# Altium PCB ETL_RB_v1.3.PcbDoc (part 2 of 5)
Units mm, origin at the board's own origin, x right, y up, seen from the top; angles counter-clockwise.
Board outline 130.3 x 56.5 mm, 8 copper layers (Top Layer, plane 1, M1, plane 2, plane 3, M2, plane 4, Bottom Layer), stack 0.972 mm thick; 212 components, 186 nets, 1928 pads, 1009 vias.
Unrouted connection lines stored in the file: 379.
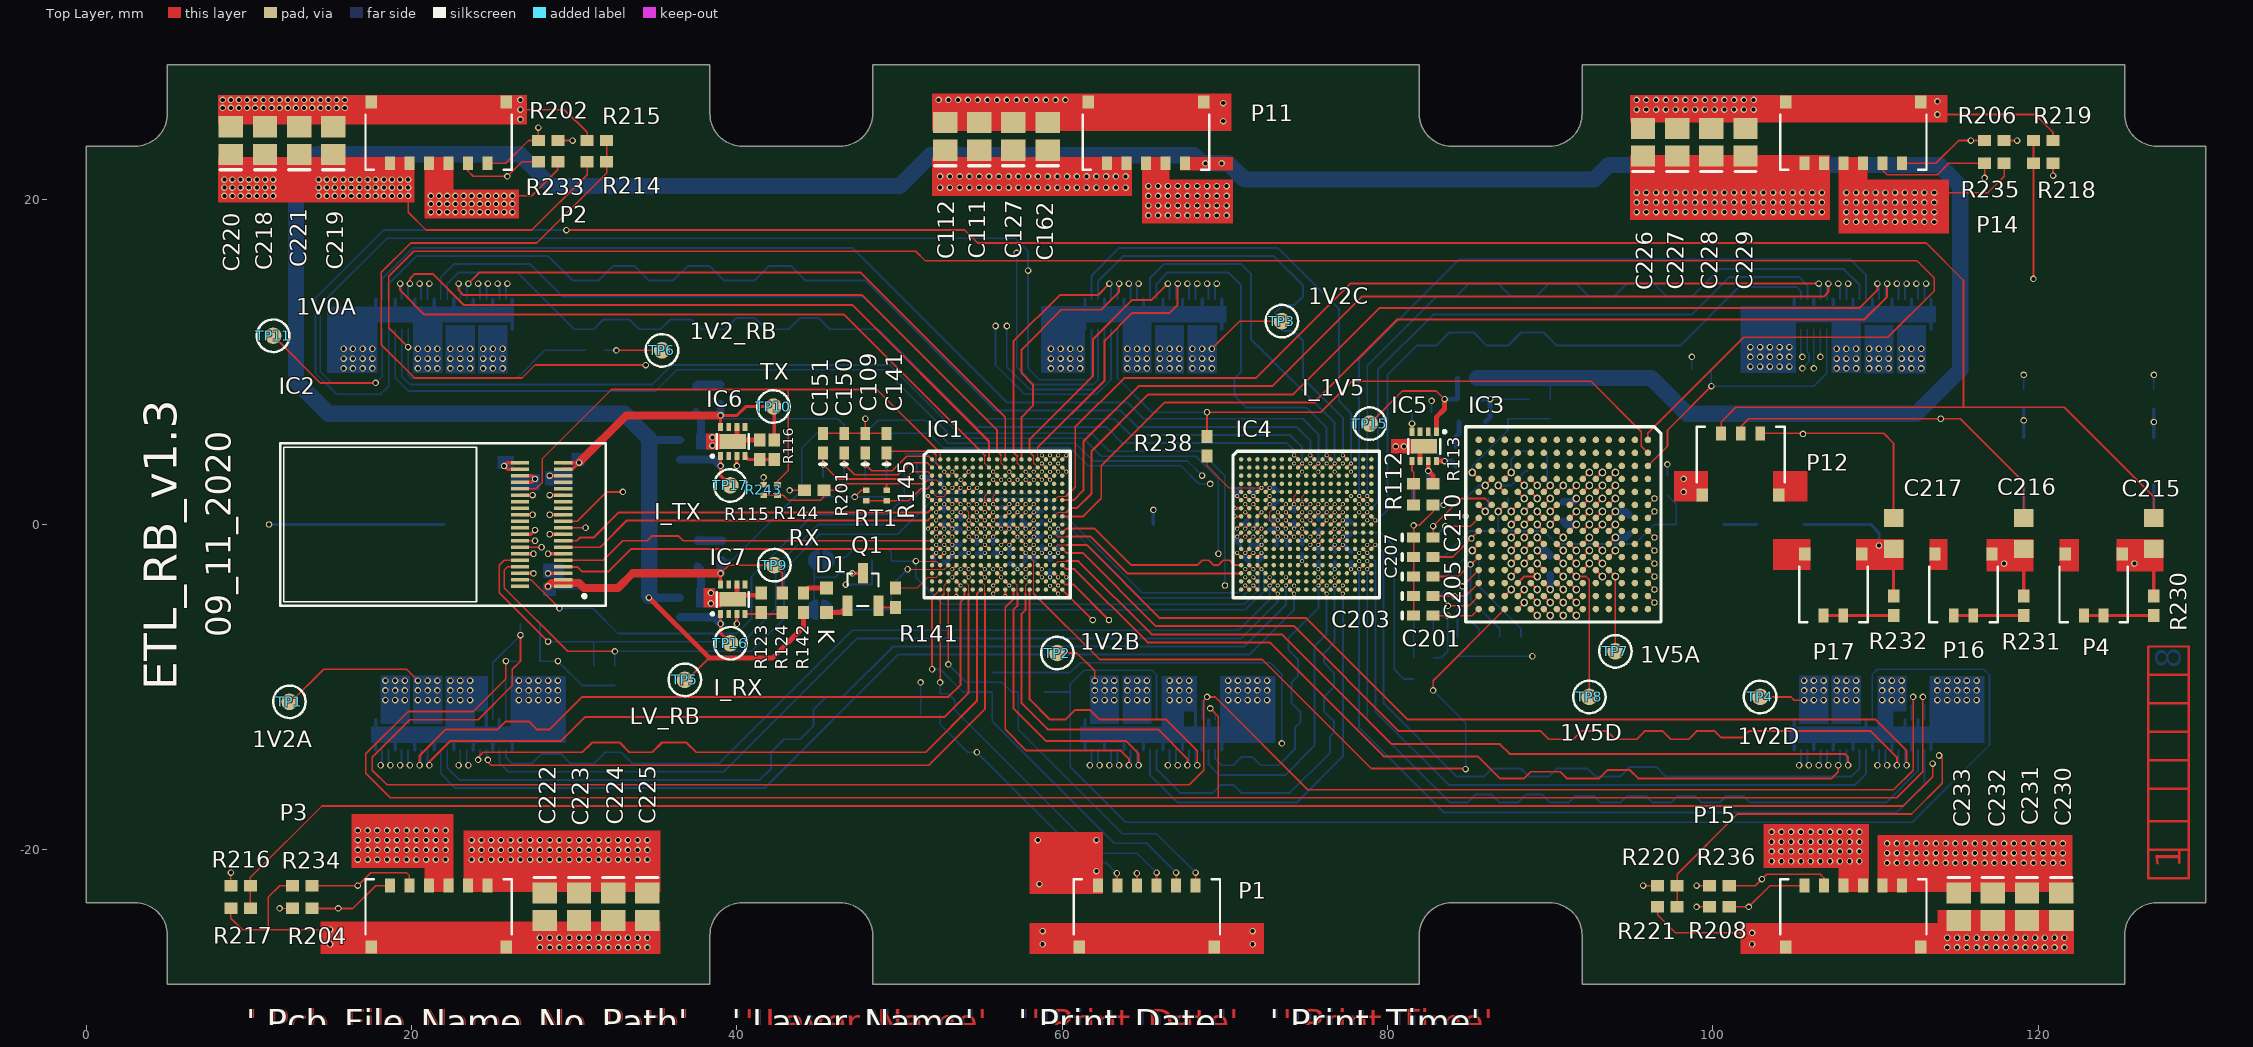
[diagram p0: Top Layer view]

## Via types
v1: diameter 0.4, hole 0.25, Top Layer to Bottom Layer, 1009 vias

## Nets (pads, with @x,y where several pads share a name; then routed paths per layer and width w, separated by ;. In a path a pad name is that pad's centre, name@x,y a point inside that pad or via, vN(x,y) a via of type N, cw(c..) or ccw(c..) an arc to the next point about the centre after c; other vN are vias at no path point) (continued)
1V2A: C218.1 C219.1 C220.1 C221.1 P2.1 P2.2 P5.1 P5.2 P5.3 P5.4 P5.5 P5.6 P5.7 P5.8 P5.9 P5.10 P6.6 P6.7 P6.8 P6.9 P6.10 R214.2 TP1.1 | length 23.7
  Top Layer w0.102: TP1.1@12.5,-10.9 12.6,-10.9 14.6,-8.9 19.7,-8.9 v1(20.4,-9.6) ; v1(19.8,20.2) 19.8,19.2 20.9,18.1 27.4,18.1 30.8,21.5 R214.2@30.8,22.3
  other v1: 20.4,-10.8 21,-10.8 21.6,-10.8 20.4,-10.2 21,-10.2 21.6,-10.2 21,-9.6 21.6,-9.6 22.4,9.6 23,9.6 23.6,9.6 24.4,9.6 25,9.6 25.6,9.6 22.4,10.2 23,10.2 23.6,10.2 24.4,10.2 25,10.2 25.6,10.2 22.4,10.8 23,10.8 23.6,10.8 24.4,10.8 25,10.8 25.6,10.8 8.5,20.2 9,20.2 9.5,20.2 10,20.2 10.5,20.2 11,20.2 11.5,20.2 14.3,20.2 14.8,20.2 15.3,20.2 15.8,20.2 16.3,20.2 16.8,20.2 17.3,20.2 17.8,20.2 18.3,20.2 18.8,20.2 19.3,20.2 8.5,20.7 9,20.7 9.5,20.7 10,20.7 10.5,20.7 11,20.7 11.5,20.7 14.3,20.7 14.8,20.7 15.3,20.7 15.8,20.7 16.3,20.7 16.8,20.7 17.3,20.7 17.8,20.7 18.3,20.7 18.8,20.7 19.3,20.7 19.8,20.7 8.5,21.2 9,21.2 9.5,21.2 10,21.2 10.5,21.2 11,21.2 11.5,21.2 14.3,21.2 14.8,21.2 15.3,21.2 15.8,21.2 16.3,21.2 16.8,21.2 17.3,21.2 17.8,21.2 18.3,21.2 18.8,21.2 19.3,21.2 19.8,21.2